# Altium PCB PCB1.PcbDoc
Units mm, origin at the board's own origin, x right, y up, seen from the top; angles counter-clockwise.
Board outline 110 x 65 mm, 2 copper layers (Top Layer, Bottom Layer); 29 components, 31 nets, 140 pads, 21 vias.
Unrouted connection lines stored in the file: 1.
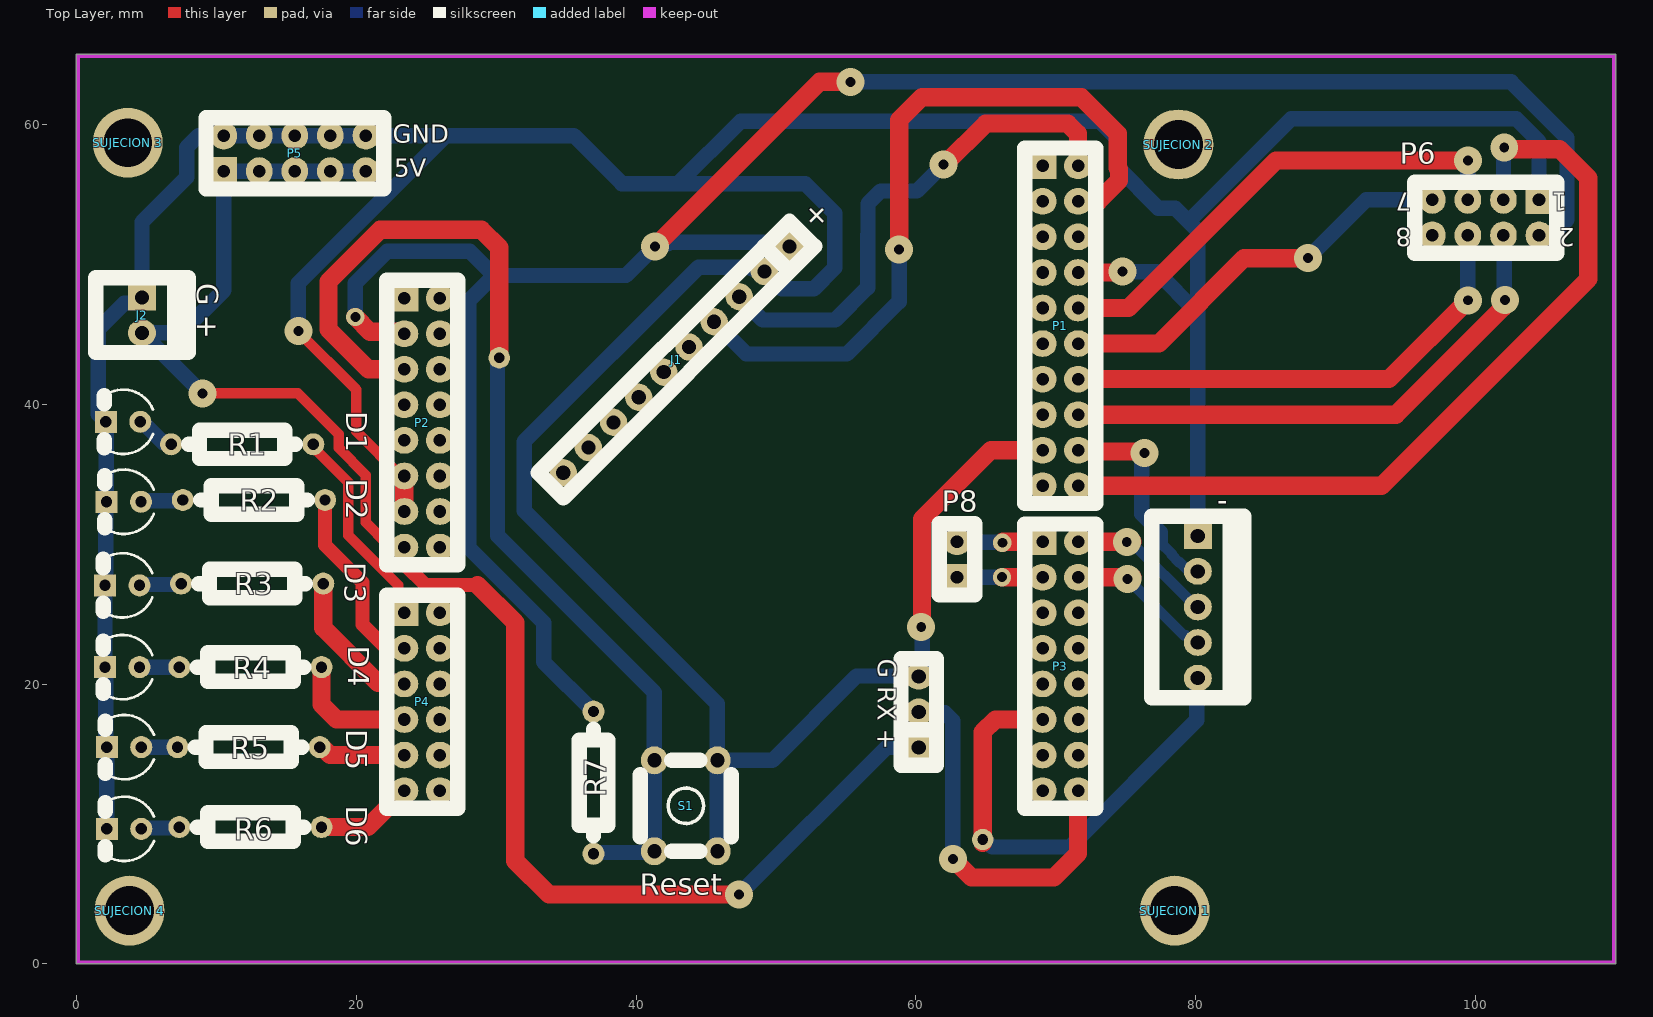
[diagram p0: Top Layer view]
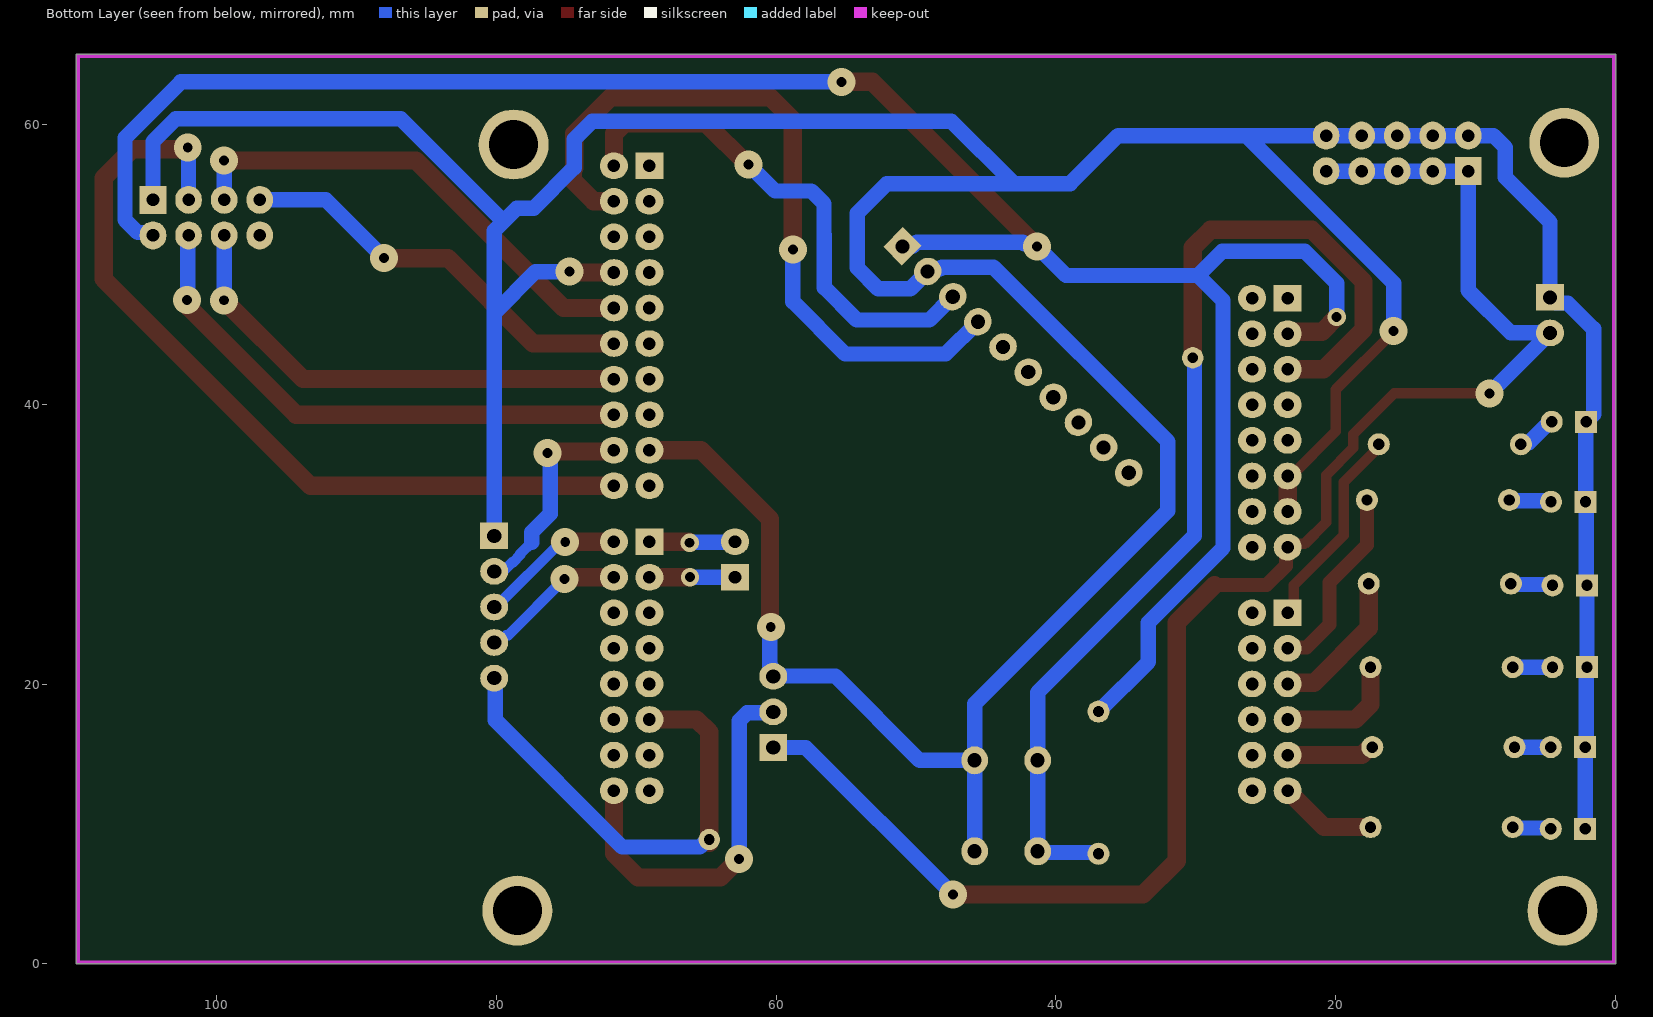
[diagram p1: Bottom Layer view, seen from below]

## Layer stack, top to bottom
Top Solder: solder mask 0.0102, Solder Resist, Dk 3.5
Top Layer: signal copper 0.0356
Dielectric 1: dielectric 0.32, FR-4, Dk 4.8
Bottom Layer: signal copper 0.0356
Bottom Solder: solder mask 0.0102, Solder Resist, Dk 3.5

## Board outline
0,0 110,0 110,65 0,65

## Design rules (kind name [scope] priority, off if disabled: settings)
Clearance [All] p1: gap=0.5 ignorepadtopadclearanceinfootprint=FALSE
PolygonConnect [All] p1: connectstyle=Relief reliefconductorwidth=0.254 reliefentries=4 polygonreliefangle="90 Angle" airgapwidth=0.254
RoutingVias [All] p1: holewidth=0.711 width=2 viastyle="Through Hole" minholewidth=0.711 minwidth=2 maxholewidth=0.711 maxwidth=3
SolderMaskExpansion [All] p1: expansion=0.102 istentingtop=FALSE
Width [All] p1: maxlimit=1.4 minlimit=0.75 preferedwidth=1 minimp=50.000000 maximp=50.000000 favimp=50.000000
30 further rules are at their usual default settings.

## Components (designator, comment, footprint, x,y, rotation, side; value= is the part's Value field where it differs from the comment)
- "ESC" MOLEX5 80.135,30.586 r270 top (schematic designator J6)
D1 "LED" LED3 3.361,38.735 r180 top
D2 "LED" LED3 3.408,33.02 r180 top
D3 "LED" LED3 3.302,27.051 r180 top
D4 "LED" LED3 3.302,21.209 r180 top
D5 "LED" LED3 3.429,15.494 r180 top
D6 "LED" LED3 3.429,9.652 r180 top
"G RX +" "Tx/Rx" SIP3 60.198,18.007 r90 top (schematic designator J7)
J1 "MPU0" SIP10 50.965,51.268 r225 top
J2 "Vin" MOLEX2 4.699,47.625 r270 top
P1 "Header 10X2" HDR2X10 69.045,57.026 r270 top locked
P2 "Header 8X2" HDR2X8 23.445,47.566 r270 top locked
P3 "Header 8X2" HDR2X8 69.045,30.166 r270 top locked
P4 "Header 6X2" HDR2X6 23.445,25.086 r270 top locked
P5 "Header 5X2" HDR2X5 10.541,56.642 r0 top
P6 "NRF24L01" HDR2X4 104.513,54.595 r180 top
P8 "Ultrasonico" HDR1X2 62.93,27.633 r90 top
R1 "180" RES400 16.938,37.127 r180 top
R2 "180" RES400 17.78,33.147 r180 top
R3 "180" RES400 17.653,27.178 r180 top
R4 "180" RES400 17.526,21.209 r180 top
R5 "180" RES400 17.399,15.494 r180 top
R6 "180" RES400 17.526,9.779 r180 top
R7 "1k" RES400 36.957,7.874 r90 top
S1 "TACT SWITCH" TACTSWITCH 43.561,11.303 r0 top
"SUJECION 1" "SUJECION" "SUJECION (5.00MM - 3.50MM)" 78.486,3.81 r90 top
"SUJECION 2" "SUJECION" "SUJECION (5.00MM - 3.50MM)" 78.74,58.547 r90 top
"SUJECION 3" "SUJECION" "SUJECION (5.00MM - 3.50MM)" 3.683,58.674 r90 top
"SUJECION 4" "SUJECION" "SUJECION (5.00MM - 3.50MM)" 3.81,3.81 r90 top

## Footprints (in the part's own frame and the unit in brackets; to place one, negate y for a bottom-side part, rotate by r counter-clockwise, add the part's x,y. Pads: shape width x height; smd on the part's side, far side on the other; paste and mask are expansions set on the pad)
HDR1X2 [mm] "Connector; Header; 2 Position"
  rect 1.9x2 hole 0.9: 1(0,0)
  oval 1.9x2 hole 0.9: 2(2.54,0)
  silkscreen extent -1.27,-1.27 3.81,1.27
HDR2X4 [mm] "Connector; Header; 4x2 Position"
  rect 1.9x2 hole 0.9: 1(0,0)
  oval 1.9x2 hole 0.9: 2(0,2.54) 3(2.54,0) 4(2.54,2.54) 5(5.08,0) 6(5.08,2.54) 7(7.62,0) 8(7.62,2.54)
  silkscreen extent -1.27,-1.27 8.89,3.81
HDR2X5 [mm] "Connector; Header; 5x2 Position"
  rect 1.9x2 hole 0.9: 1(0,0)
  oval 1.9x2 hole 0.9: 2(0,2.54) 3(2.54,0) 4(2.54,2.54) 5(5.08,0) 6(5.08,2.54) 7(7.62,0) 8(7.62,2.54) 9(10.16,0) 10(10.16,2.54)
  silkscreen extent -1.27,-1.27 11.43,3.81
HDR2X6 [mm] "Connector; Header; 6x2 Position"
  rect 1.9x2 hole 0.9: 1(0,0)
  oval 1.9x2 hole 0.9: 2(0,2.54) 3(2.54,0) 4(2.54,2.54) 5(5.08,0) 6(5.08,2.54) 7(7.62,0) 8(7.62,2.54) 9(10.16,0) 10(10.16,2.54) 11(12.7,0) 12(12.7,2.54)
  silkscreen extent -1.27,-1.27 13.97,3.81
HDR2X8 [mm] "Connector; Header; 8x2 Position"
  rect 1.9x2 hole 0.9: 1(0,0)
  oval 1.9x2 hole 0.9: 2(0,2.54) 3(2.54,0) 4(2.54,2.54) 5(5.08,0) 6(5.08,2.54) 7(7.62,0) 8(7.62,2.54) 9(10.16,0) 10(10.16,2.54) 11(12.7,0) 12(12.7,2.54) 13(15.24,0) 14(15.24,2.54) 15(17.78,0) 16(17.78,2.54)
  silkscreen extent -1.27,-1.27 19.05,3.81
HDR2X10 [mm] "Connector; Header; 10x2 Position"
  rect 1.9x2 hole 0.9: 1(0,0)
  oval 1.9x2 hole 0.9: 2(0,2.54) 3(2.54,0) 4(2.54,2.54) 5(5.08,0) 6(5.08,2.54) 7(7.62,0) 8(7.62,2.54) 9(10.16,0) 10(10.16,2.54) 11(12.7,0) 12(12.7,2.54) 13(15.24,0) 14(15.24,2.54) 15(17.78,0) 16(17.78,2.54) 17(20.32,0) 18(20.32,2.54) 19(22.86,0) 20(22.86,2.54)
  silkscreen extent -1.27,-1.27 24.13,3.81
LED3 [mil]
  round 62 hole 32: 1(-48,0)
  rect 62x62 hole 32: 2(49,0)
  silkscreen extent -84,-90 54,90, body extent -65,-64 65,65, height 19
MOLEX2 [mm]
  rect 1.9x2 hole 1.016: 1(0,0)
  oval 1.9x2 hole 1.016: 2(2.54,0)
  silkscreen extent -1.4,-3.3 3.94,3.3, body extent -1.27,-3.18 3.81,3.18, height 10.74
MOLEX5 [mm]
  rect 1.9x2 hole 1.016: 1(0,0)
  oval 1.9x2 hole 1.016: 2(2.54,0) 3(5.08,0) 4(7.62,0) 5(10.16,0)
  silkscreen extent -1.4,-3.3 11.56,3.3, body extent -1.27,-3.18 11.43,3.18, height 10.74
RES400 [mil]
  round 62 hole 32: 1(0,0) 2(400,0)
  silkscreen extent 50,-40 350,40, body extent -12,-45 412,46, height 96
SIP3 [mm]
  rect 1.9x2 hole 1.016: 1(-2.54,0)
  oval 1.9x2 hole 1.016: 2(0,0) 3(2.54,0)
  silkscreen extent -3.81,-1.27 3.81,1.27, body extent -3.81,-1.3 3.81,1.24, height 8.38
SIP10 [mm]
  rect 1.9x2 hole 1.016: 1(0,0)
  oval 1.9x2 hole 1.016: 2(2.54,0) 3(5.08,0) 4(7.62,0) 5(10.16,0) 6(12.7,0) 7(15.24,0) 8(17.78,0) 9(20.32,0) 10(22.86,0)
  silkscreen extent -1.27,-1.27 24.13,1.27, body extent -1.27,-1.3 24.13,1.27, height 8.38
"SUJECION (5.00MM - 3.50MM)" [mm]
  round 5 hole 3.5: 1(0,0)
TACTSWITCH [mm]
  oval 1.9x2 hole 1.016: 1(-2.25,-3.25) 2(-2.25,3.25) 3(2.25,-3.25) 4(2.25,3.25)
  silkscreen extent -3.25,-3.25 3.25,3.25, body extent -3.05,-3.95 3.15,3.95, height 7

## Part data
-: library part MOLEX5
"G RX +": library part CON3
J1: library part CON10
J2: library part MOLEX2
P1: "Header, 10-Pin, Dual row", LatestRevisionDate=17-Jul-2002, LatestRevisionNote="Re-released for DXP Platform.", Publisher="Altium Limited"
P2 P3: "Header, 8-Pin, Dual row", LatestRevisionDate=17-Jul-2002, LatestRevisionNote="Re-released for DXP Platform.", Publisher="Altium Limited"
P4: "Header, 6-Pin, Dual row", LatestRevisionDate=17-Jul-2002, LatestRevisionNote="Re-released for DXP Platform.", Publisher="Altium Limited"
P5: "Header, 5-Pin, Dual row", LatestRevisionDate=17-Jul-2002, LatestRevisionNote="Re-released for DXP Platform.", Publisher="Altium Limited"
P6: library part "Header 4X2", "Header, 4-Pin, Dual row", LatestRevisionDate=17-Jul-2002, LatestRevisionNote="Re-released for DXP Platform.", Publisher="Altium Limited"
P8: library part "Header 2", "Header, 2-Pin", LatestRevisionDate=17-Jul-2002, LatestRevisionNote="Re-released for DXP Platform.", Publisher="Altium Limited"
R1 R2 R3 R4 R5 R6 R7: library part RES

## Free pads (board coordinates)
  round 1.524 hole 0.762: 8(64.77,8.89) 11(30.226,43.307)

## Via types
v1: diameter 2, hole 0.711, Top Layer to Bottom Layer, 18 vias
v2: diameter 1.3, hole 0.711, Top Layer to Bottom Layer, 3 vias

## Nets (pads, with @x,y where several pads share a name; then routed paths per layer and width w, separated by ;. In a path a pad name is that pad's centre, name@x,y a point inside that pad or via, vN(x,y) a via of type N, cw(c..) or ccw(c..) an arc to the next point about the centre after c; other vN are vias at no path point)
3.3V: J1.1 P2.3 P2.7 P6.2 R7.2 | length 155.8
  Top Layer w1.3: v2(19.939,46.228) 20.997,45.17 P2.3@23.301,45.17 ; v1(41.362,51.268) 53.12,63.026 v1(55.326,63.026)
  Bottom Layer w1.1: v2(19.939,46.228) 19.939,48.641 22.225,50.927 28.109,50.927 29.845,49.191 ; P2.3@23.301,45.17 P2.3 ; R7.2 33.401,21.59 33.401,24.384 28.067,29.718 28.067,47.413 29.845,49.191 ; J1.1 50.258,51.268 49.95,51.575 42.376,51.575 42.26,51.459 41.553,51.459 39.285,49.191 29.845,49.191 ; v1(55.326,63.026) 102.517,63.026 106.513,59.029 106.513,53.16 105.611,52.258 104.716,52.258 P6.2
CE_PTA0: P1.20 P6.3 | length 60.5
  Top Layer w1.3: P1.20 93.249,34.166 108.036,48.953 108.036,56.153 105.974,58.216 102.164,58.216 v1(102.031,58.35)
  Bottom Layer w1.1: P6.3 101.973,58.292 v1(102.031,58.35)
CNS_PTD0: P1.16 P6.4 | length 38.8
  Top Layer w1.3: P1.16 94.302,39.246 101.945,46.889 101.945,47.311 v1(102.079,47.445)
  Bottom Layer w1.1: P6.4 102.026,52.002 102.026,47.498 v1(102.079,47.445)
GND: "G RX +.3" -.1 D1.2 D2.2 D3.2 D4.2 D5.2 D6.2 J1.2 J2.1 P1.8 P1.17 P2.11 P2.13 P5.2 P5.4 P5.6 P5.8 P5.10 P6.1 S1.3 S1.4 | length 349.9
  Top Layer w0.75: v1@15.875,45.165 19.997,41.042 19.997,38.046 P2.11@23.177,34.866
  Top Layer w1: v1@15.875,45.165 v1(15.875,45.212) ; P2.11@23.177,34.866 P2.11
  Top Layer w1.3: P2.13 P2.11 ; v1(60.375,24.084) 60.439,24.148 60.439,31.774 65.37,36.706 P1.17 ; P1.8 74.684,49.406 v1(74.746,49.468)
  Bottom Layer w1.1: D6.2 D5.2 2.121,15.557 2.121,21.145 D4.2 D3.2 2.11,27.104 2.11,32.967 D2.2 2.14,33.043 2.14,38.712 1.587,39.264 1.587,45.375 3.437,47.225 4.299,47.225 J2.1 4.699,53.008 7.888,56.197 7.888,58.332 8.738,59.182 P5.2 P5.4 P5.6 P5.8 P5.10 26.416,59.182 ; v1(15.875,45.212) 15.875,48.641 26.416,59.182 ; S1.3 S1.4 ; 60.198,20.547 60.171,20.574 55.753,20.574 49.732,14.553 S1.4 ; 60.439,20.788 60.342,20.885 60.342,21.221 60.439,21.318 v1@60.439,24.084 ; P1.8 P1.8@71.729,49.262 ; v1(74.746,49.468) 77.182,49.468 80.124,46.526 ; -.1@80.124,30.586 80.124,46.526 ; P6.1 104.513,58.766 102.88,60.4 86.815,60.4 79.465,53.049 ; 26.416,59.182 35.56,59.182 38.989,55.753 43.013,55.753 ; 43.013,55.753 47.482,60.222 73.118,60.222 74.421,58.919 74.421,56.89 77.322,53.988 78.526,53.988 79.465,53.049 ; 43.013,55.753 52.082,55.753 54.192,53.643 54.192,49.737 52.699,48.243 50.397,48.243 J1.2 48.978,49.663 48.271,49.663 48.155,49.779 44.46,49.779 32.004,37.323 32.004,32.385 45.811,18.578 S1.4 ; 79.465,53.049 80.124,52.39 80.124,46.526
MISO: P1.12 P6.7 | length 29.6
  Top Layer w1.3: P1.12 77.351,44.326 83.452,50.427 v1(87.994,50.427)
  Bottom Layer w1.1: v1(87.994,50.427) 92.162,54.595 P6.7
MOSI: P1.14 P6.6 | length 34.8
  Top Layer w1.3: P1.14 93.801,41.786 v1(99.435,47.42) ; P6.6 P6.6@99.435,52.053
  Bottom Layer w1.1: P6.6 P6.6 99.434,47.422 v1(99.435,47.42)
Net-_2: -.2 P1.18 | length 15.4
  Top Layer w1.3: P1.18 71.681,36.61 76.222,36.61 v1(76.334,36.498)
  Bottom Layer w0.75: 77.444,30.11 78.26,29.294 78.26,29.223 78.773,28.711 78.844,28.711 -.2@79.509,28.046
  Bottom Layer w1.1: v1(76.334,36.498) 76.143,36.306 76.143,32.152 77.444,30.851 77.444,30.11 ; -.2@79.621,28.141 80.04,28.141 -.2
Net-_3: -.3 P3.2 | length 10.9
  Top Layer w1.3: P3.2 v1@75.475,30.166
  Bottom Layer w0.75: v1(75.06,30.143) 75.387,30.143 80.024,25.506 -.3
Net-_4: -.4 P3.4 | length 10.8
  Top Layer w1.3: P3.4 v1@75.475,27.626
  Bottom Layer w0.75: v1(75.112,27.515) 79.146,23.481 79.281,23.481 79.797,22.966 -.4
Net-_5: -.5 P3.11 pad.8 | length 34.9
  Top Layer w1.3: pad.8@64.77,8.636 pad.8 64.77,16.559 65.677,17.466 P3.11
  Bottom Layer w1.1: pad.8 64.912,8.89 65.442,8.36 70.996,8.36 80.048,17.412 80.048,20.338 -.5
NetD1_1: D1.1 R1.2 | length 2.9
  Bottom Layer w1.1: D1.1 4.736,38.735 6.233,37.237 6.668,37.237 R1.2
NetD2_1: D2.1 R2.2 | length 3
  Bottom Layer w1.1: D2.1 4.69,33.084 7.556,33.084 R2.2
NetD3_1: D3.1 R3.2 | length 3
  Bottom Layer w1.1: D3.1 4.585,27.114 7.429,27.114 R3.2
NetD4_1: D4.1 R4.2 | length 2.8
  Bottom Layer w1.1: D4.1 R4.2
NetD5_1: D5.1 R5.2 | length 2.6
  Bottom Layer w1.1: D5.1 R5.2
NetD6_1: D6.1 R6.2 | length 2.8
  Bottom Layer w1.1: D6.1 4.712,9.716 7.302,9.716 R6.2
NetP3_1: P3.1 P8.2 | length 6.2
  Top Layer w1.3: v2(66.166,30.094) 66.239,30.166 P3.1
  Bottom Layer w1.1: P8.2 62.97,30.133 66.126,30.133 v2(66.166,30.094)
NetP3_3: P3.3 P8.1 | length 6.1
  Top Layer w1.3: v2(66.139,27.633) 66.143,27.63 69.041,27.63 P3.3
  Bottom Layer w1.1: P8.1 v2(66.139,27.633)
NetP4_1: P4.1 R1.1 | length 14.7
  Top Layer w0.75: R1.1 16.938,36.91 19.442,34.406 19.442,30.64 23.021,27.061 23.021,25.51 P4.1
NetP4_3: P4.3 R2.1 | length 13.7
  Top Layer w1: R2.1 17.78,29.924 20.449,27.254 20.449,24.255 22.098,22.606 P4.3@23.385,22.606
  Bottom Layer w1.1: P4.3@23.385,22.606 P4.3 P4.3@23.424,22.546
NetP4_5: P4.5 R3.1 | length 10.6
  Top Layer w1.3: R3.1 17.653,24.003 21.57,20.086 23.365,20.086 P4.5
NetP4_7: P4.7 R4.1 | length 9
  Top Layer w1.3: R4.1 17.526,18.542 18.602,17.466 P4.7
NetP4_9: P4.9 R5.1 | length 6.3
  Top Layer w1.3: R5.1 17.555,15.494 18.123,14.926 P4.9
NetP4_11: P4.11 R6.1 | length 7
  Top Layer w1.3: R6.1 20.838,9.779 P4.11
RESET: P2.5 pad.11 R7.1 S1.1 S1.2 | length 76.5
  Top Layer w1.3: P2.5 20.887,42.486 18.034,45.339 18.034,48.768 21.717,52.451 28.956,52.451 30.226,51.181 pad.11
  Bottom Layer w1.1: pad.11 30.099,43.053 30.099,30.607 41.311,19.395 S1.2 S1.1 41.221,7.963 37.046,7.963 R7.1
Rx: "G RX +.2" P3.16 | length 27.3
  Top Layer w1.3: v1(62.635,7.5) 63.964,6.171 69.865,6.171 71.585,7.891 P3.16
  Bottom Layer w1.1: 60.198,18.007 60.268,17.937 62.073,17.937 62.635,17.375 v1(62.635,7.5)
SCK: P1.10 P6.5 | length 35.2
  Top Layer w1.3: P1.10 75.184,46.866 85.724,57.406 v1(99.433,57.406)
  Bottom Layer w1.1: P6.5 v1(99.433,57.406) v1@99.533,57.505
SCL: J1.3 P1.2 | length 37
  Top Layer w1.3: v1(61.956,57.111) 62.044,57.111 64.989,60.056 70.841,60.056 71.585,59.312 P1.2
  Bottom Layer w1.1: J1.3 49.041,46.008 54.232,46.008 56.548,48.323 56.548,52.107 56.575,52.135 56.575,54.324 57.475,55.223 60.068,55.223 v1(61.956,57.111) ; P1.2 P1.2@71.585,57.223
SDA: J1.4 P1.4 | length 53
  Top Layer w1.3: v1(58.801,51.054) 58.801,60.297 60.432,61.928 71.802,61.928 74.421,59.31 74.421,56.89 74.515,56.796 74.515,55.967 73.046,54.498 71.597,54.498 P1.4
  Bottom Layer w1.1: J1.4 47.879,43.577 55.056,43.577 58.801,47.323 v1(58.801,51.054)
Tx: P3.14
Vin: "G RX +.1" J2.2 P2.15 P5.1 P5.3 P5.5 P5.7 P5.9 | length 115.5
  Top Layer w0.75: v1(9.017,40.767) 15.825,40.767 17.182,39.41 17.186,39.41 18.747,37.849 18.747,36.868 20.692,34.923 20.692,31.556 22.243,30.006 23.225,30.006 P2.15
  Top Layer w1: P2.15@23.579,29.652 23.579,28.447 24.956,27.071 28.682,27.071
  Top Layer w1.3: P2.15 P2.15@23.579,29.652 ; 28.682,27.071 31.369,24.384 31.369,7.366 33.782,4.953 v1(47.371,4.953)
  Bottom Layer w1.1: v1(9.017,40.767) J2.2 7.493,45.085 10.541,48.133 P5.1 P5.3 P5.5 P5.7 P5.9 ; v1(47.371,4.953) 57.885,15.467 60.198,15.467
pads on no net: "SUJECION 1.1" "SUJECION 2.1" "SUJECION 3.1" "SUJECION 4.1" J1.5 J1.6 J1.7 J1.8 J1.9 J1.10 P1.1 P1.3 P1.5 P1.6 P1.7 P1.9 P1.11 P1.13 P1.15 P1.19 P2.1 P2.2 P2.4 P2.6 P2.8 P2.9 P2.10 P2.12 P2.14 P2.16 P3.5 P3.6 P3.7 P3.8 P3.9 P3.10 P3.12 P3.13 P3.15 P4.2 P4.4 P4.6 P4.8 P4.10 P4.12 P6.8

## Keep-outs
Keep-Out Layer:
  lines w0.254: 0.129,0.128 109.864,0.128 109.864,64.873 0.129,64.873 0.129,0.128

## Silkscreen, mask and mechanical layers (free items; w line width, h text height)
Top Overlay:
  text "+" at 52.758,52.377 h1.52 r45
  text "G +" at 8.636,48.641 h1.52 r270
  text "Reset" at 40.259,4.953 h1.52
Mechanical 1:
  region: 34.77,33.556 47.498,20.828 65.45,38.78 52.722,51.508

## Text inside footprints (layer, text, board x,y; h text height)
P5: Top Overlay "GND" at 22.606,58.674 h1.27; Top Overlay "5V" at 22.733,56.261 h1.27
P6: Top Overlay "2" at 107.053,52.563 h1.27 r180; Top Overlay "1" at 106.545,55.103 h1.27 r180; Top Overlay "7" at 95.369,55.103 h1.27 r180; Top Overlay "8" at 95.369,52.563 h1.27 r180